# Altium PCB Main.PcbDoc
Units mm, origin at the board's own origin, x right, y up, seen from the top; angles counter-clockwise.
Board outline 143.13 x 91.19 mm, 2 copper layers (Top Layer, Bottom Layer); 39 components, 29 nets, 114 pads, 0 vias.
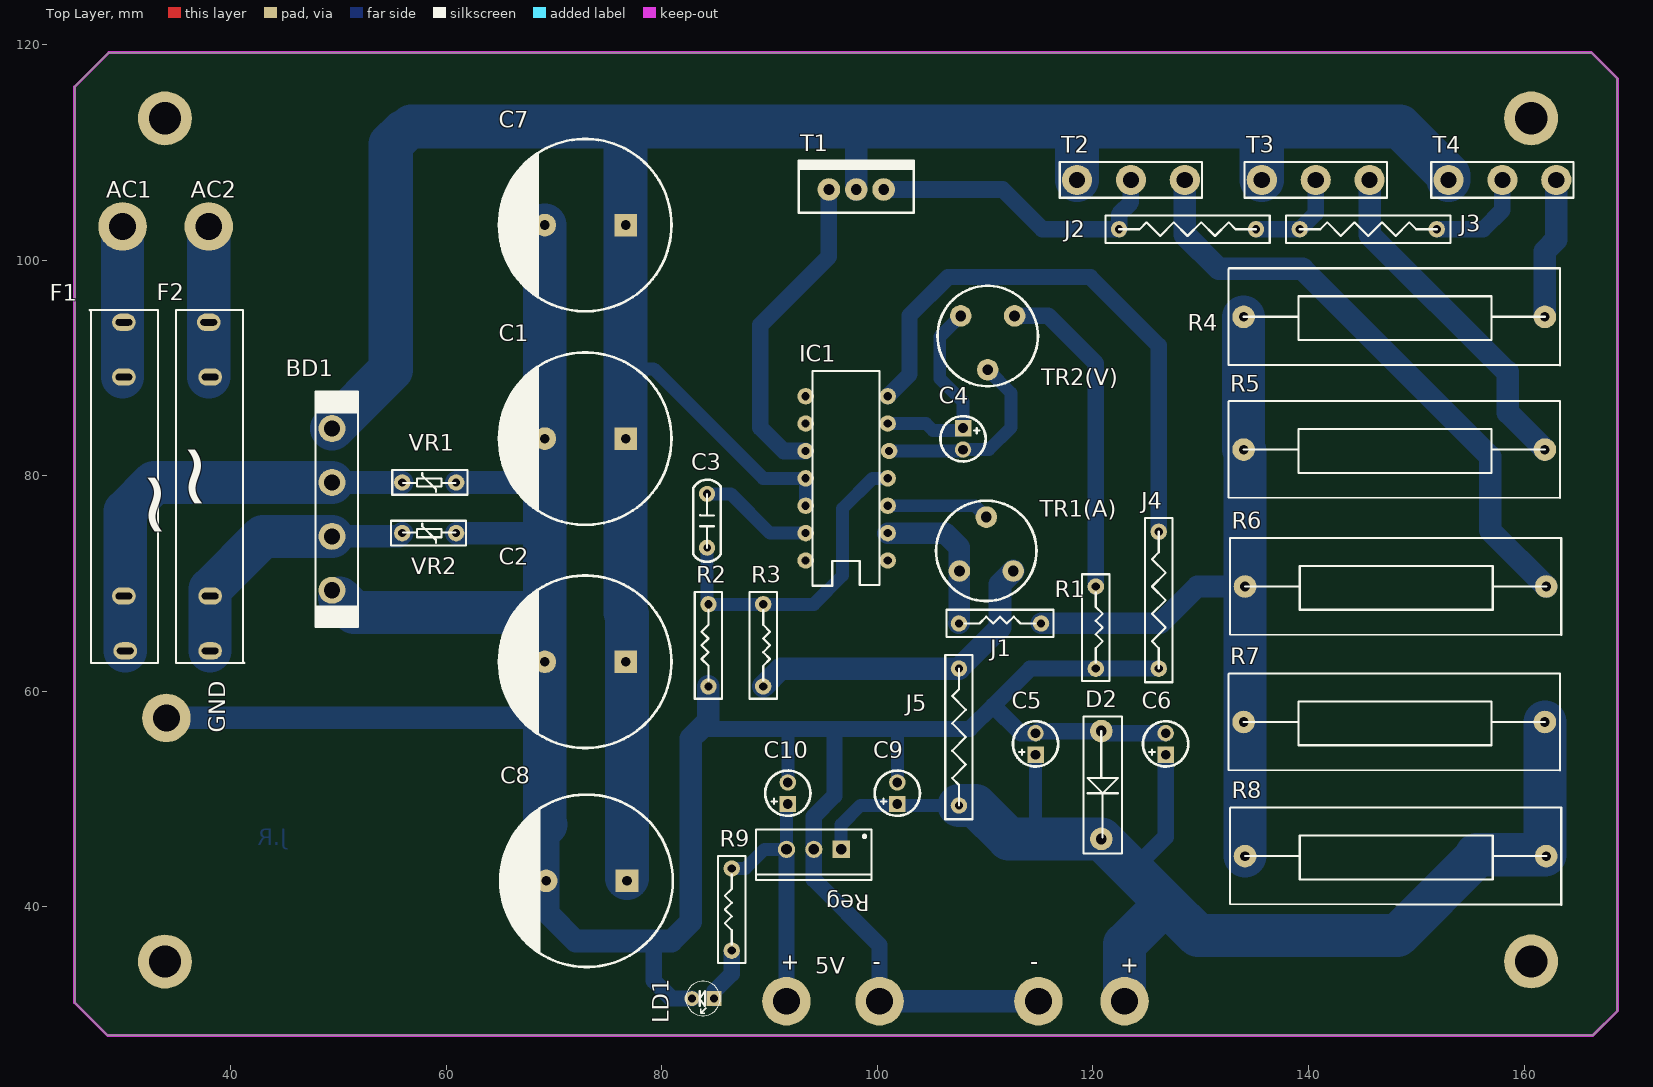
[diagram p0: Top Layer view]
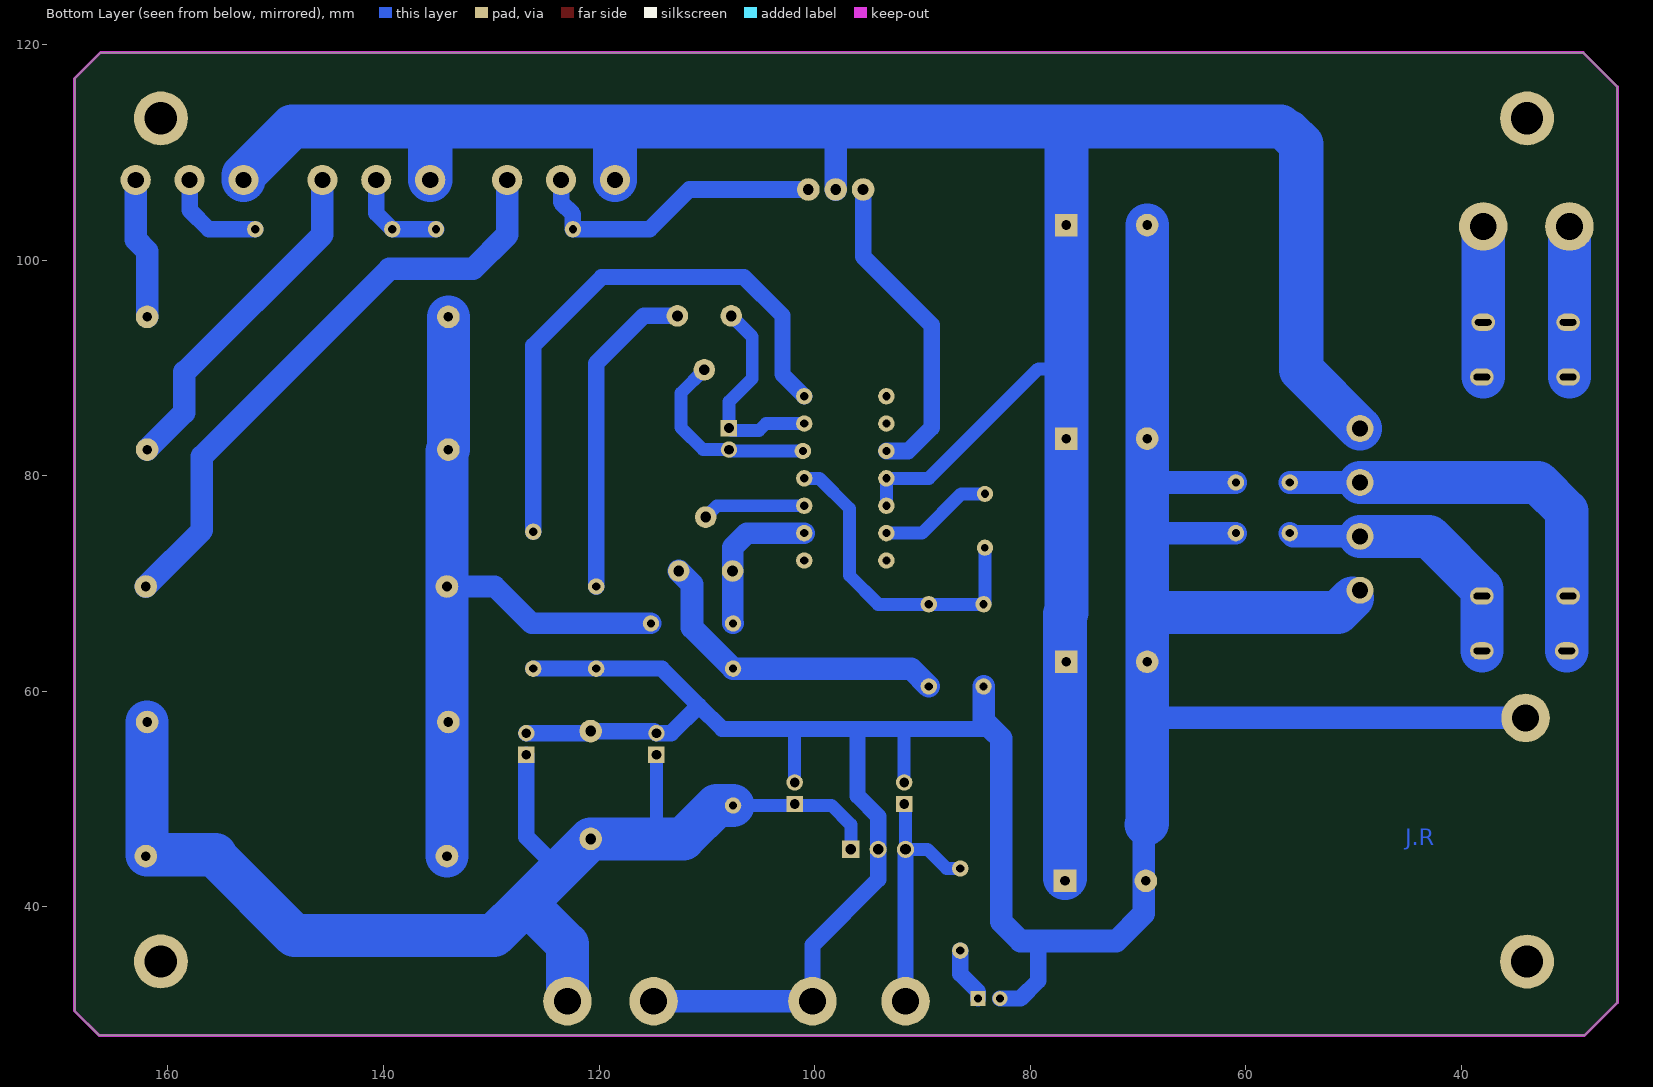
[diagram p1: Bottom Layer view, seen from below]
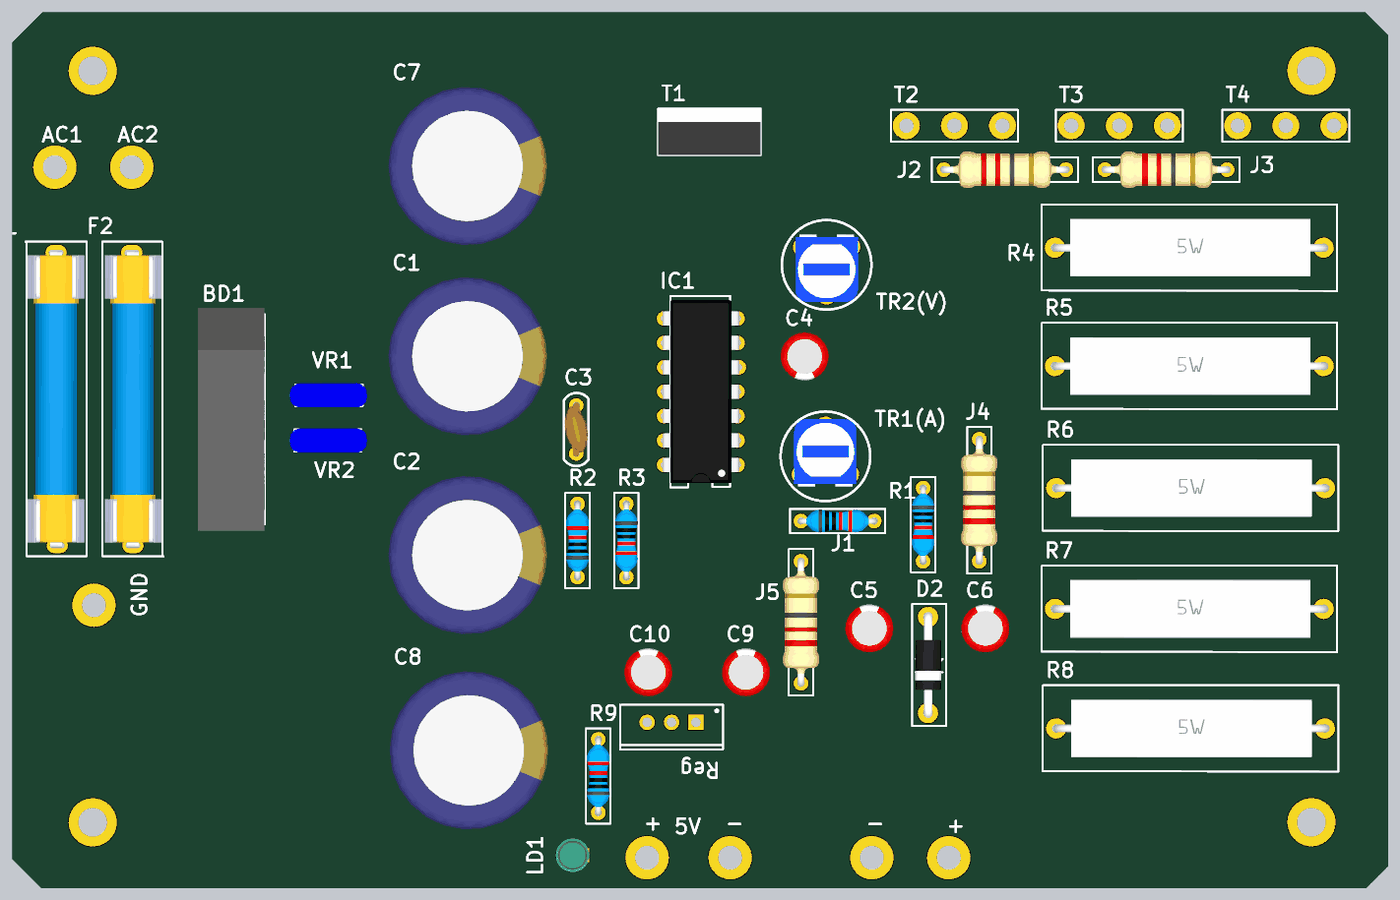
[diagram p2: 3D render of the assembled board from above, using the file's embedded part models]

## Layer stack, top to bottom
Top Solder: solder mask 0.0102, Solder Resist, Dk 3.5
Top Layer: signal copper 0.0356
Dielectric 1: dielectric 0.32, FR-4, Dk 4.8
Bottom Layer: signal copper 0.0356
Bottom Solder: solder mask 0.0102, Solder Resist, Dk 3.5

## Board outline
28.575,28.067 25.527,31.115 25.527,116.078 28.702,119.253 166.243,119.253 168.656,116.84 168.656,30.353 166.37,28.067

## Design rules (kind name [scope] priority, off if disabled: settings)
Clearance [All] p1: gap=0.254
Height [All] p1: minheight=0 maxheight=50 prefheight=12.7
PolygonConnect [All] p1: connectstyle=Relief reliefconductorwidth=0.254 reliefentries=4 polygonreliefangle="90 Angle" airgapwidth=0.254
RoutingVias [All] p1: holewidth=0.711 width=1.27 viastyle="Through Hole" minholewidth=0.711 minwidth=1.27 maxholewidth=0.711 maxwidth=1.27
SolderMaskExpansion [All] p1: expansion=0.102
UnpouredPolygon [All] p1: allowunpoured=FALSE
Width [All] p1: maxlimit=5 minlimit=0.254 preferedwidth=0.254 minimp=50.000000 maximp=50.000000 favimp=50.000000
28 further rules are at their usual default settings.

## Components (designator, comment, footprint, x,y, rotation, side; value= is the part's Value field where it differs from the comment)
BD1 "Comment" RECTIFIER_8A 49.403,76.875 r90 top
C1 "Comment" CAP_ELEC_2200uF_50V 72.898,83.439 r180 top
C2 "Comment" CAP_ELEC_2200uF_50V 72.898,62.738 r180 top
C3 "Comment" CAP_CERAMIC 84.201,75.819 r270 top
C4 "Comment" CAP_Elec_10uF_16V 107.95,83.423 r270 top
C5 "Comment" CAP_Elec_100uF_16V 114.681,55.118 r90 top
C6 "Comment" CAP_Elec_100uF_16V 126.746,55.118 r90 top
C7 "Comment" CAP_ELEC_2200uF_50V 72.898,103.251 r180 top
C8 "Comment" CAP_ELEC_2200uF_50V 73.025,42.418 r180 top
C9 "Comment" CAP_Elec_100uF_16V 101.854,50.546 r90 top
C10 "Comment" CAP_Elec_100uF_16V 91.694,50.546 r90 top
D2 "Comment" DIODE_Gen_1A_10mm 120.777,51.308 r270 top
F1 "Comment" Fuse_5*20mm 30.099,78.994 r270 top
F2 "Comment" Fuse_5*20mm 38.1,78.994 r90 top
IC1 "Comment" DIP14_GEN 97.155,79.756 r90 top
J1 "Comment" RES_GEN_025W 111.379,66.294 r0 top
J2 "Comment" RES_GEN_05W 128.778,102.87 r180 top
J3 "Comment" RES_GEN_05W 145.542,102.87 r180 top
J4 "Comment" RES_GEN_05W 126.111,68.453 r270 top
J5 "Comment" RES_GEN_05W 107.569,55.753 r270 top
LD1 "Comment" LED-3mm 83.82,31.496 r180 top
R1 "Comment" RES_GEN_025W 120.269,65.913 r270 top
R2 "Comment" RES_GEN_025W 84.328,64.262 r90 top
R3 "Comment" RES_GEN_025W 89.408,64.262 r270 top
R4 "Comment" "RES_GEN_05W - duplicate" 147.955,94.742 r0 top
R5 "Comment" "RES_GEN_05W - duplicate" 147.955,82.423 r0 top
R6 "Comment" "RES_GEN_05W - duplicate" 148.082,69.723 r0 top
R7 "Comment" "RES_GEN_05W - duplicate" 147.955,57.15 r0 top
R8 "Comment" "RES_GEN_05W - duplicate" 148.082,44.704 r0 top
R9 "Comment" RES_GEN_025W 86.487,39.751 r90 top
Reg "Comment" TO-220AB 94.107,45.339 r180 top
T1 "Comment" TO220_Gen 98.044,106.553 r0 top
T2 "Comment" TO72_GEN 123.524,107.442 r180 top
T3 "Comment" TO72_GEN 140.669,107.442 r180 top
T4 "Comment" TO72_GEN 157.988,107.442 r180 top
TR1(A) "Comment" RES_Trimmer 110.109,73.66 r0 top
TR2(V) "Comment" RES_Trimmer 110.236,92.329 r180 top
VR1 "Comment" Varistor_Gen_5mm 58.42,79.375 r0 top
VR2 "Comment" Varistor_Gen_5mm 58.42,74.676 r180 top

## Footprints (in the part's own frame and the unit in brackets; to place one, negate y for a bottom-side part, rotate by r counter-clockwise, add the part's x,y. Pads: shape width x height; smd on the part's side, far side on the other; paste and mask are expansions set on the pad)
CAP_CERAMIC [mm] "General Ceramic Capacitor"
  round 1.5 hole 0.762: 1(-2.5,0)
  round 1.5 hole 0.7: 2(2.5,0)
  silkscreen extent -3.81,-1.28 3.81,1.27, body extent -2.92,-1.7 2.92,1.7, height 6
CAP_Elec_10uF_16V [mm] "10uF"
  rect 1.524x1.524 hole 0.9: +(-1,0)
  round 1.524 hole 0.9: -(1,0)
  silkscreen extent -2.1,-2.1 2.1,2.1, body extent -2.5,-2.5 2.49,2.5, height 19.11
CAP_Elec_100uF_16V [mm] "100uF"
  rect 1.524x1.524 hole 0.9: +(-1,0)
  round 1.524 hole 0.9: -(1,0)
  silkscreen extent -2.1,-2.1 2.1,2.1, body extent -2.5,-2.5 2.49,2.5, height 19.11
CAP_ELEC_2200uF_50V [mm] "2200uF-50V"
  rect 2.1x2.1 hole 0.9: +(-3.75,0)
  round 2.1 hole 0.9: -(3.75,0)
  silkscreen extent -8,-8 8,8, body extent -8.25,-8.25 8.25,8.25, height 34.5
DIODE_Gen_1A_10mm [mm] "1N4007"
  round 2.1 hole 1: 1(-5,0) 2(5,0)
  silkscreen extent -6.35,-1.65 6.35,1.91, body extent -5.51,-1.32 5.51,1.4, height 2.72
DIP14_GEN [mil] "DIP14"
  round 60 hole 30: 1(-300,-150) 2(-200,-150) 3(-100,-150) 4(0,-150) 5(100,-155) 6(200,-150) 7(300,-150) 8(300,150) 9(200,150) 10(100,150) 11(0,150) 12(-100,150) 13(-200,150) 14(-300,150)
  silkscreen extent -392,-120 393,125, body extent -375,-157 375,157, height 58
Fuse_5*20mm [mm]
  oval 1.6x2.2 hole 0.6 slot 1.54 at 90 deg: 1(-15.24,0) 1(-10.16,0) 1(10.16,0) 1(15.24,0.127)
  silkscreen extent -16.38,-3.18 16.38,3.18, body extent -15.44,-2.95 15.44,2.95, height 9.84
LED-3mm [mil]
  rect 55x55 hole 30: 1(-40,0)
  round 55 hole 30: 2(40,0)
  silkscreen extent -63,-63 63,63, body extent -69,-69 69,69, height 154
RECTIFIER_8A [mm] "8A"
  round 2.5 hole 1.5: +(7.5,0) -(-7.5,0) ~(-2.5,0) ~(2.5,0)
  silkscreen extent -10.92,-2.41 10.92,1.52, body extent -11.6,-2.41 11.6,4.54, height 20.65
RES_GEN_05W [mil] "0.5W Resistor"
  round 60 hole 30: 21(-250,0) 22(250,0)
  silkscreen extent -300,-50 300,50, body extent -265,-74 265,74, height 172
"RES_GEN_05W - duplicate" [mm] "5W Resistor"
  round 2.1 hole 0.9: 1(-13.97,0) 2(13.97,0)
  silkscreen extent -15.37,-4.5 15.37,4.5, body extent -14.26,-3 14.48,3, height 7.01
RES_GEN_025W [mil] "0.25 Resistor"
  round 60 hole 30: 1(-150,0) 2(150,0)
  silkscreen extent -195,-50 195,50, body extent -162,-47 162,47, height 126
RES_Trimmer [mm] "General Trimmer"
  round 2 hole 1: 1(0,2.5) 2(-2.5,-2.5) 3(2.5,-2.5)
  silkscreen extent -4.66,-5.29 4.66,4.02, body extent -3.25,-3.81 3.25,3.24, height 8
TO72_GEN [mm]
  round 2.8 hole 1.5: 1(5,0) 2(0,0) 3(-5,0)
  silkscreen extent -6.6,-1.65 6.6,1.65
TO220_Gen [mm] "TO220"
  round 2.1 hole 1: B(-2.54,0) C(0,0) E(2.54,0)
  silkscreen extent -5.33,-2.16 5.33,2.67, body extent -5.34,-2.16 5.34,2.67, height 20.86
TO-220AB [mm] "TO, Thru-Hole, Vertical, Heatsink Mounted; 3 In-Line Leads; Pitch 2.54 mm"
  rect 1.6x1.6 hole 1: 1(-2.54,0)
  round 1.6 hole 1: 2(0,0) 3(2.54,0)
  silkscreen extent -5.35,-1.85 5.35,2.85, body extent -5.4,-1.9 5.4,2.9, height 19.3
Varistor_Gen_5mm [mil]
  round 60 hole 30: 1(-98.43,0) 2(98.43,0)
  silkscreen extent -135,-45 140,45, body extent -157,-50 157,49, height 62

## Free pads (board coordinates)
  round 5 hole 3: 1(33.909,34.925) 1(33.909,113.157) 1(160.655,34.935) 1(160.655,113.157)
  round 4.5 hole 2.5: AC1(29.972,103.124) AC2(37.973,103.124) GND(34.036,57.531) GND(100.203,31.242) GND(114.935,31.242) Vout(91.567,31.242) Vout(122.936,31.242)

## Nets (pads, with @x,y where several pads share a name; then routed paths per layer and width w, separated by ;. In a path a pad name is that pad's centre, name@x,y a point inside that pad or via, vN(x,y) a via of type N, cw(c..) or ccw(c..) an arc to the next point about the centre after c; other vN are vias at no path point)
AC1: BD1.~@49.403,74.375 F2.1@38.1,63.754 F2.1@38.1,68.834 VR2.2 | length 25.7
  Bottom Layer w2.1: BD1.~@49.403,74.375 55.619,74.375 VR2.2
  Bottom Layer w4: F2.1@38.1,63.754 38.1,68.834 38.1,69.469 43.006,74.375 BD1.~@49.403,74.375
AC2: BD1.~@49.403,79.375 F1.1@30.099,68.834 F1.1@30.226,63.754 VR1.1 | length 39.8
  Bottom Layer w2.1: BD1.~@49.403,79.375 VR1.1
  Bottom Layer w4: F1.1@30.226,63.754 30.226,76.708 32.893,79.375 BD1.~@49.403,79.375
AC_IN_1: F1.1@30.099,89.154 F1.1@30.099,94.234 pad.AC1 | length 14
  Bottom Layer w4: F1.1@29.972,89.154 pad.AC1
AC_IN_2: F2.1@37.973,94.234 F2.1@38.1,89.154 pad.AC2 | length 14
  Bottom Layer w4: F2.1@37.973,89.154 37.973,94.234 pad.AC2
GND: BD1.- C1.- C2.- C5.- C6.- C7.- C8.- C9.- C10.- D2.1 IC1.7 J4.21 J4.22 LD1.2 pad.GND R1.2 R2.1 Reg.2 VR1.2 VR2.1 | length 348.9
  Bottom Layer w1.2: C10.- 91.694,56.388 ; C9.- 101.854,56.515
  Bottom Layer w1.5: 79.248,36.83 79.248,33.147 80.899,31.496 LD1.2 ; 83.566,56.515 96.012,56.515 ; pad.GND@100.203,31.242 100.203,36.449 94.107,42.545 Reg.2 94.107,48.387 96.012,50.292 96.012,56.515 ; IC1.7 102.997,89.408 102.997,94.869 106.553,98.425 119.761,98.425 126.111,92.075 J4.21 ; J4.22 R1.2 114.173,62.103 110.744,58.674 108.585,56.515 101.854,56.515 96.012,56.515
  Bottom Layer w1.54: 110.744,58.674 113.3,56.118 C5.- 114.871,56.308 D2.1 120.967,56.118 C6.-
  Bottom Layer w2.1: pad.GND@34.036,57.531 69.021,57.531 69.148,57.404 ; VR1.2 68.894,79.375 69.148,79.629 ; VR2.1 69.021,74.676 69.148,74.803 ; 69.275,47.625 69.469,47.431 69.469,39.37 72.009,36.83 79.248,36.83 80.899,36.83 82.677,38.608 82.677,55.626 83.566,56.515 84.328,57.277 R2.1 ; pad.GND@100.203,31.242 pad.GND@114.935,31.242
  Bottom Layer w4: BD1.-@50.118,68.66 51.468,67.31 69.148,67.31 ; C7.- 69.148,79.629 69.148,74.803 69.148,67.31 ; 69.275,47.625 69.148,47.752 69.148,57.404 69.148,67.31
IC_2: 
IC_3: IC1.3 TR1(A).1 | length 9.6
  Bottom Layer w1.2: IC1.3 109.053,77.216 110.109,76.16
IC_4: C3.2 IC1.4 R2.2 R3.1 | length 30.4
  Bottom Layer w1.2: C3.2 84.201,68.199 R2.2 R3.1 94.107,68.072 96.774,70.739 96.774,76.962 99.568,79.756 IC1.4
IC_5: C4.- IC1.5 TR2(V).1 | length 18.3
  Bottom Layer w1.2: IC1.5 C4.-@107.823,82.296 ; C4.- 110.363,82.423 112.395,84.455 112.395,87.67 110.236,89.829
IC_6: C4.+ IC1.6 TR2(V).3 | length 19.4
  Bottom Layer w1.2: IC1.6 104.521,84.836 105.156,84.201 107.728,84.201 C4.+ 107.95,86.868 105.791,89.027 105.791,92.884 107.736,94.829
IC_13: C3.1 IC1.13 | length 10.7
  Bottom Layer w1.2: C3.1 86.4,78.319 90.043,74.676 IC1.13
J1_1: IC1.2 J1.1 J1.2 R4.1 R5.1 R6.1 R7.1 R8.1 TR1(A).2 | length 84.9
  Bottom Layer w1.54: R4.1@133.858,94.869 R4.1 ; R5.1 R5.1@134.112,82.296
  Bottom Layer w2: IC1.2 106.299,74.676 107.609,73.366 107.609,71.16 107.609,66.334 J1.1 ; J1.2 126.238,66.294 129.667,69.723 R6.1
  Bottom Layer w4: R5.1 R4.1 ; R8.1 R6.1 R5.1@134.112,82.296
J2_1: 
J3_2: 
J4_2: 
J5_1: J2.21 J2.22 J3.21 J3.22 T1.E T2.2 T3.2 T4.2 | length 47.3
  Bottom Layer w1.54: T1.E 111.633,106.553 115.316,102.87 J2.22 122.428,104.267 123.524,105.363 T2.2 ; J2.21 J3.22 140.669,104.347 T3.2 ; J3.21 156.21,102.87 157.988,104.648 T4.2
J5_2: 
J6_1: 
LED_PWR: LD1.1 R9.1 | length 5.1
  Bottom Layer w1.5: LD1.1 84.836,32.131 86.487,33.782 R9.1
R4_1: R4.2 T4.3 | length 13.1
  Bottom Layer w2.1: R4.2 161.925,100.838 162.988,101.901 T4.3
R5_1: R5.2 T3.3 | length 31.7
  Bottom Layer w2.1: T3.3 145.669,102.362 158.369,89.662 ; 158.496,89.662 158.496,85.852 R5.2
R6_1: R6.2 T2.3 | length 56.1
  Bottom Layer w2.1: T2.3 128.524,102.362 131.699,99.187 139.446,99.187 156.845,81.788 156.845,74.93 R6.2
R7_1: 
TR1_3: 
TR2_2: R1.1 TR2(V).2 | length 30.1
  Bottom Layer w1.54: 112.736,94.829 115.864,94.829 120.269,90.424 R1.1
V_5V: C10.+ pad.Vout@91.567,31.242 R9.2 Reg.3 | length 24
  Bottom Layer w1.2: R9.2 87.757,43.561 89.535,45.339 Reg.3 C10.+@91.567,49.419
  Bottom Layer w1.5: pad.Vout@91.567,31.242 Reg.3
V_DC_Out: C5.+ C6.+ C9.+ D2.2 J5.21 J5.22 pad.Vout@122.936,31.242 R3.2 R7.2 R8.2 Reg.1 TR1(A).3 | length 149.1
  Bottom Layer w1.2: Reg.1 96.647,47.625 98.425,49.403 J5.22 ; 114.681,46.308 C5.+
  Bottom Layer w1.54: 123.761,43.497 126.746,46.482 C6.+
  Bottom Layer w2.1: R3.2 91.059,62.103 J5.21 111.379,65.913 111.379,69.93 112.609,71.16
  Bottom Layer w4: J5.22 109.093,49.403 112.188,46.308 114.681,46.308 D2.2 126.746,40.339 122.936,36.529 pad.Vout@122.936,31.242 ; 126.873,40.212 129.747,37.338 148.273,37.338 155.67,44.736 155.575,44.831 161.925,44.831 R7.2
VCC: BD1.+ C1.+ C2.+ C7.+ C8.+ IC1.11 IC1.12 T1.C T2.1 T3.1 T4.1 | length 237.4
  Bottom Layer w1.2: 76.648,89.916 79.248,89.916 89.408,79.756 IC1.11 IC1.12
  Bottom Layer w2.1: 97.79,112.395 98.044,112.141 T1.C
  Bottom Layer w4.1: BD1.+ 54.864,89.836 54.864,110.744 56.007,111.887 ; 56.769,112.395 97.79,112.395 118.524,112.395 ; 76.648,112.268 76.648,89.916 76.648,67.31 76.775,67.183 C8.+@76.775,42.672 ; T2.1 118.524,112.395 ; T3.1 135.669,112.108 ; T4.1 152.988,107.87 148.463,112.395 118.524,112.395
Vout: IC1.10 T1.B | length 29.8
  Bottom Layer w1.54: IC1.10 91.313,82.296 89.154,84.455 89.154,93.98 95.504,100.33 T1.B
pads on no net: IC1.1 IC1.8 IC1.9 IC1.14

## Keep-outs
Keep-Out Layer:
  the board outline again, w0.254

## Other copper
Bottom Layer:
  text "J.R" at 45.212,45.72 h1.52

## Silkscreen, mask and mechanical layers (free items; w line width, h text height)
Top Overlay:
  text "AC1" at 28.448,105.791 h1.52
  text "AC2" at 36.322,105.791 h1.52
  text "GND" at 39.497,56.134 h1.52 r90
  text "+" at 91.059,34.163 h1.52
  text "-" at 99.568,34.163 h1.52
  text "-" at 114.173,34.163 h1.52
  text "+" at 122.555,33.909 h1.52
  text "5V" at 94.234,33.782 h1.52

## Text inside footprints (layer, text, board x,y; h text height)
F1: Top Overlay "~" at 28.575,80.645 h10 r270
F2: Top Overlay "~" at 41.148,76.581 h10 r90